# EAGLE board TinyNES_Enclosure_Side (EAGLE 9.6.2)
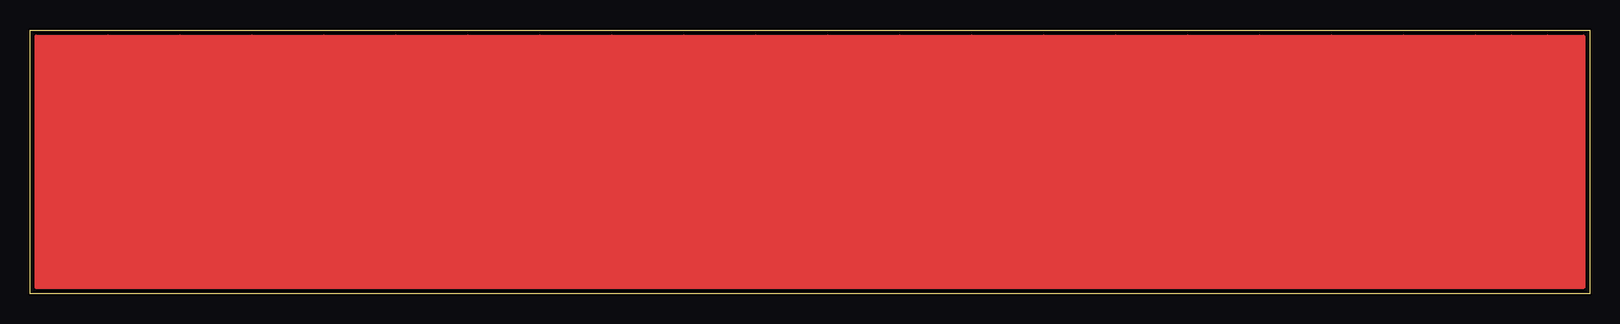
[diagram p0: board, top side]
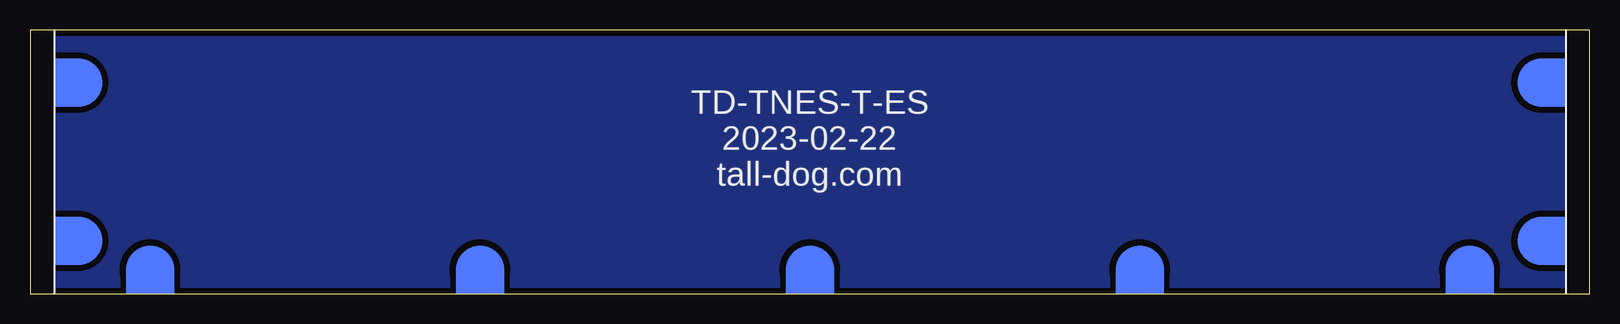
[diagram p1: board, bottom side, seen from below]

Size 130 x 22 mm. Coordinates in mm from the lower left corner, seen from the top.
Outline: 130,22 130,0 0,0 0,22 130,22
Copper layers (1*16): Top 0.035mm / dielectric 1.5mm / Bottom 0.035mm
Design rules "default *": minimum track width 6mil, minimum drill 0.35mm, track to track 6mil, track to pad 6mil, pad to pad 6mil, via to via 6mil, smd to smd 6mil, copper to edge 20mil, drill to drill 6mil, minimum pad ring 10mil, minimum via ring 8mil, stop-mask expansion 0mil, vias tented up to drill 0mil, thermal gap 10mil

## Placement (x,y rotation side)
E$1  [_ENCLOSURE-PATTERN]  9.5,11 0 top
E$2  [_ENCLOSURE-PATTERN]  15.5,11 0 top
E$3  [_ENCLOSURE-PATTERN]  21.5,11 0 top
E$4  [_ENCLOSURE-PATTERN]  93.5,11 0 top
E$5  [_ENCLOSURE-PATTERN]  99.5,11 0 top
E$6  [_ENCLOSURE-PATTERN]  105.5,11 0 top
E$7  [_ENCLOSURE-PATTERN]  111.5,11 0 top
E$8  [_ENCLOSURE-PATTERN]  117.5,11 0 top
E$9  [_ENCLOSURE-PATTERN]  123.5,11 0 top
E$10  [_ENCLOSURE-PATTERN]  126.5,11 0 top
E$11  [_ENCLOSURE-PATTERN]  27.5,11 0 top
E$13  [_ENCLOSURE-PATTERN]  33.5,11 0 top
E$16  [_ENCLOSURE-PATTERN]  39.5,11 0 top
E$20  [_ENCLOSURE-PATTERN]  3.5,11 0 top
E$22  [_ENCLOSURE-PATTERN]  45.5,11 0 top
E$32  [_ENCLOSURE-PATTERN]  87.5,11 0 top
E$34  [_ENCLOSURE-PATTERN]  81.5,11 0 top
E$36  [_ENCLOSURE-PATTERN]  75.5,11 0 top
E$38  [_ENCLOSURE-PATTERN]  69.5,11 0 top
E$40  [_ENCLOSURE-PATTERN]  63.5,11 0 top
E$41  [_ENCLOSURE-PATTERN]  57.5,11 0 top
E$42  [_ENCLOSURE-PATTERN]  51.5,11 0 top
E$49  [_ENCLOSURE-SOLDER-POINT]  120,0 180 bottom
E$50  [_ENCLOSURE-SOLDER-POINT]  128,4.4 90 bottom
E$51  [_ENCLOSURE-SOLDER-POINT]  128,17.6 90 bottom
E$52  [_ENCLOSURE-SOLDER-POINT]  92.5,0 180 bottom
E$53  [_ENCLOSURE-SOLDER-POINT]  65,0 180 bottom
E$54  [_ENCLOSURE-SOLDER-POINT]  37.5,0 180 bottom
E$55  [_ENCLOSURE-SOLDER-POINT]  10,0 180 bottom
E$56  [_ENCLOSURE-SOLDER-POINT]  2,17.6 270 bottom
E$57  [_ENCLOSURE-SOLDER-POINT]  2,4.4 270 bottom

## Library data of the parts
E$1-E$11 E$13 E$16 E$20 E$22 E$32 E$34 E$36 E$38 E$40-E$42 E$49-E$57 = TinyNES_Library

## Tracks (layer width: path | path; a pad name or v marks a point on that pad's centre or on a via)
GND
  pour Bottom (isolate 0.508): 127.75,22 2.25,22 2.25,0 127.75,0

## Text on the board
bPlace: TD-TNES-T-ES / 2023-02-22 / tall-dog.com